# EAGLE board sch (EAGLE 7.4.0)

Size 164.77 x 114.29 mm. Coordinates in mm from the lower left corner, seen from the top.
Outline: 0,0 164.77,0 164.77,114.29 0,114.29 0,0
Copper layers (1*16): Top 0.035mm / dielectric 1.5mm / Bottom 0.035mm
Design rules "default": minimum track width 10mil, minimum drill 24mil, track to track 8mil, track to pad 8mil, pad to pad 8mil, via to via 8mil, smd to smd 8mil, copper to edge 40mil, drill to drill 8mil, minimum pad ring 10mil, minimum via ring 8mil, stop-mask expansion 4mil, vias tented up to drill 0mil, thermal gap 10mil

## Footprints (pad centres in the part's own frame; a part is rotated, then mirrored left to right if it is on the bottom)
MA06-1 = drill 1.016 long: 1 -6.35,0; 2 -3.81,0; 3 -1.27,0; 4 1.27,0; 5 3.81,0; 6 6.35,0
MA08-1 = drill 1.016 long: 1 -8.89,0; 2 -6.35,0; 3 -3.81,0; 4 -1.27,0; 5 1.27,0; 6 3.81,0; 7 6.35,0; 8 8.89,0
255SB = drill 1.118 long: 1 -3.81,0; 2 0,0; 3 3.81,0
C025-025X050 = drill 0.813 octagon: 1 -1.27,0; 2 1.27,0
MA04-1 = drill 1.016 long: 1 -3.81,0; 2 -1.27,0; 3 1.27,0; 4 3.81,0
MA03-1 = drill 1.016 long: 1 -2.54,0; 2 0,0; 3 2.54,0
DIL28-3 = drill 0.813 long: 1 -16.51,-3.81; 2 -13.97,-3.81; 3 -11.43,-3.81; 4 -8.89,-3.81; 5 -6.35,-3.81; 6 -3.81,-3.81; 7 -1.27,-3.81; 8 1.27,-3.81; 9 3.81,-3.81; 10 6.35,-3.81; 11 8.89,-3.81; 12 11.43,-3.81; 13 13.97,-3.81; 14 16.51,-3.81; 15 16.51,3.81; 16 13.97,3.81; 17 11.43,3.81; 18 8.89,3.81; 19 6.35,3.81; 20 3.81,3.81; 21 1.27,3.81; 22 -1.27,3.81; 23 -3.81,3.81; 24 -6.35,3.81; 25 -8.89,3.81; 26 -11.43,3.81; 27 -13.97,3.81; 28 -16.51,3.81
DIL16 = drill 0.813 long: 1 -8.89,-3.81; 2 -6.35,-3.81; 3 -3.81,-3.81; 4 -1.27,-3.81; 5 1.27,-3.81; 6 3.81,-3.81; 7 6.35,-3.81; 8 8.89,-3.81; 9 8.89,3.81; 10 6.35,3.81; 11 3.81,3.81; 12 1.27,3.81; 13 -1.27,3.81; 14 -3.81,3.81; 15 -6.35,3.81; 16 -8.89,3.81
AVR_ICSP = drill 1.016 pad 1.88 octagon: 1 -1.27,5.08; 2 1.27,5.08; 3 -1.27,2.54; 4 1.27,2.54; 5 -1.27,0; 6 1.27,0; 7 -1.27,-2.54; 8 1.27,-2.54; 9 -1.27,-5.08; 10 1.27,-5.08
LED3MM = drill 0.813 octagon: A -1.27,0; K 1.27,0
HC49/S = drill 0.813: 1 -2.413,0; 2 2.413,0
0204/5 = drill 0.813 octagon: 1 -2.54,0; 2 2.54,0
RN-9 = drill 0.813 long: 1 -10.16,0; 2 -7.62,0; 3 -5.08,0; 4 -2.54,0; 5 0,0; 6 2.54,0; 7 5.08,0; 8 7.62,0; 9 10.16,0
MA20-2 = drill 1.016 octagon: 1 -24.13,-1.27; 2 -24.13,1.27; 3 -21.59,-1.27; 4 -21.59,1.27; 5 -19.05,-1.27; 6 -19.05,1.27; 7 -16.51,-1.27; 8 -16.51,1.27; 9 -13.97,-1.27; 10 -13.97,1.27; 11 -11.43,-1.27; 12 -11.43,1.27; 13 -8.89,-1.27; 14 -8.89,1.27; 15 -6.35,-1.27; 16 -6.35,1.27; 17 -3.81,-1.27; 18 -3.81,1.27; 19 -1.27,-1.27; 20 -1.27,1.27; 21 1.27,-1.27; 22 1.27,1.27; 23 3.81,-1.27; 24 3.81,1.27; 25 6.35,-1.27; 26 6.35,1.27; 27 8.89,-1.27; 28 8.89,1.27; 29 11.43,-1.27; 30 11.43,1.27; 31 13.97,-1.27; 32 13.97,1.27; 33 16.51,-1.27; 34 16.51,1.27; 35 19.05,-1.27; 36 19.05,1.27; 37 21.59,-1.27; 38 21.59,1.27; 39 24.13,-1.27; 40 24.13,1.27
SMS-008 = smd 1.092 x 2.007: 1 -8.89,-4.496; 2 -6.35,-4.496; 3 -3.81,-4.496; 4 -1.27,-4.496; 5 1.27,-4.496; 6 3.81,-4.496; 7 6.35,-4.496; 8 8.89,-4.496; 9 8.89,4.496; 10 6.35,4.496; 11 3.81,4.496; 12 1.27,4.496; 13 -1.27,4.496; 14 -3.81,4.496; 15 -6.35,4.496; 16 -8.89,4.496
B3F-10XX = drill 1.016 long: 1 -3.251,2.261; 2 3.251,2.261; 3 -3.251,-2.261; 4 3.251,-2.261
DIP254P762X457-28 = drill 1.118 square: 1 -7.62,33.02 | drill 1.118: 2 -7.62,30.48; 3 -7.62,27.94; 4 -7.62,25.4; 5 -7.62,22.86; 6 -7.62,20.32; 7 -7.62,17.78; 8 -7.62,15.24; 9 -7.62,12.7; 10 -7.62,10.16; 11 -7.62,7.62; 12 -7.62,5.08; 13 -7.62,2.54; 14 -7.62,0; 15 0,0; 16 0,2.54; 17 0,5.08; 18 0,7.62; 19 0,10.16; 20 0,12.7; 21 0,15.24; 22 0,17.78; 23 0,20.32; 24 0,22.86; 25 0,25.4; 26 0,27.94; 27 0,30.48; 28 0,33.02
DIP254P762X432-16 = drill 0.991 square: 1 -7.62,17.78 | drill 0.991: 2 -7.62,15.24; 3 -7.62,12.7; 4 -7.62,10.16; 5 -7.62,7.62; 6 -7.62,5.08; 7 -7.62,2.54; 8 -7.62,0; 9 0,0; 10 0,2.54; 11 0,5.08; 12 0,7.62; 13 0,10.16; 14 0,12.7; 15 0,15.24; 16 0,17.78
LOGIC_LEVEL_CONVERTER = drill 0.8: P$1 1.27,13.97; P$2 1.27,11.43; P$3 1.27,8.89; P$4 1.27,6.35; P$5 1.27,3.81; P$6 1.27,1.27; P$7 11.43,1.27; P$8 11.43,3.81; P$9 11.43,6.35; P$10 11.43,8.89; P$11 11.43,11.43; P$12 11.43,13.97

## Placement (x,y rotation side)
3V3_BUS  [MA06-1]  106.68,88.9 0 top
5V_BUS  [MA06-1]  106.68,95.25 0 top
ANALOG_BANK0  [MA08-1]  22.86,46.99 0 top
ANALOG_BANK1  [MA08-1]  22.86,52.07 0 top
ANALOG_BANK2  [MA08-1]  22.86,57.15 0 top
ANALOG_BANK3  [MA08-1]  22.86,62.23 0 top
AUTO_SW  [255SB]  121.92,5.08 0 top
C1  [C025-025X050]  58.42,95.25 0 top
C2  [C025-025X050]  64.77,95.25 0 top
CAN_BUS  [MA04-1]  90.17,95.25 0 top
EXT_I2C0  [MA03-1]  86.36,101.6 0 top
EXT_I2C1  [MA03-1]  96.52,101.6 0 top
EXT_I2C2  [MA03-1]  106.68,101.6 0 top
EXT_I2C3  [MA03-1]  116.84,101.6 0 top
EXT_I2C4  [MA03-1]  127,101.6 0 top
EXT_I2C5  [MA03-1]  5.08,54.61 0 top
EXT_SPI0  [MA04-1]  146.05,100.33 0 top
EXT_SPI1  [MA04-1]  146.05,95.25 0 top
EXT_SPI2  [MA04-1]  147.32,90.17 0 top
EXT_SPI3  [MA04-1]  147.32,83.82 0 top
EXT_SPI4  [MA04-1]  147.32,77.47 0 top
EXT_SPI5  [MA04-1]  5.08,40.64 90 top
GND_BUS  [MA06-1]  45.72,83.82 0 top
GPIO_BANK0  [MA08-1]  152.4,50.8 0 top
GPIO_BANK1  [MA08-1]  152.4,55.88 0 top
GPIO_BANK2  [MA08-1]  152.4,60.96 0 top
GPIO_BANK3  [MA08-1]  152.4,66.04 0 top
IC1  MCP23S17SP  [DIL28-3]  140.97,29.21 0 top
IC2  MCP23S17SP  [DIL28-3]  140.97,41.91 180 top
IC3  MCP23S17SP  [DIL28-3]  24.13,95.25 0 top
IC4  74LS165N  [DIL16]  22.86,72.39 0 top
J1  AVR_SPI_PROG2PTH  [AVR_ICSP]  5.08,17.78 0 top
LED1  [LED3MM]  118.11,110.49 0 top
LED2  [LED3MM]  127,110.49 0 top
LED3  [LED3MM]  138.43,110.49 0 top
POWER_IN  [MA03-1]  3.81,5.08 90 top
PR_SW  [255SB]  106.68,5.08 0 top
Q1  [HC49/S]  60.96,102.87 0 top
R1  [0204/5]  100.33,106.68 0 top
R2  [0204/5]  92.71,106.68 0 top
R3  [0204/5]  85.09,106.68 0 top
R4  [0204/5]  77.47,106.68 0 top
RN1  [RN-9]  113.03,68.58 0 top
RPI_HEADER  [MA20-2]  29.21,105.41 0 top
RTC_CON  [MA03-1]  88.9,5.08 0 top
S1  SWS008  [SMS-008]  113.03,59.69 0 top
S2  [B3F-10XX]  129.54,92.71 0 top
SHIFT_CON  [MA03-1]  74.93,100.33 0 top
SHIFT_CONT_SW  [B3F-10XX]  129.54,82.55 0 top
SHIFT_OUT  [MA03-1]  74.93,93.98 0 top
U1  ATMEGA328P-PU  [DIP254P762X457-28]  110.49,13.97 0 top
U$1  MCP3208-CI/P  [DIP254P762X432-16]  26.67,5.08 0 top
U$2  MCP3208-CI/P  [DIP254P762X432-16]  41.91,5.08 0 top
U$3  MCP3208-CI/P  [DIP254P762X432-16]  54.61,5.08 0 top
U$4  LOGIC_LEVEL_CONVERTER  [LOGIC_LEVEL_CONVERTER]  146.05,6.35 0 top
U$5  MCP3208-CI/P  [DIP254P762X432-16]  67.31,5.08 0 top

## Library data of the parts
3V3_BUS 5V_BUS ANALOG_BANK0 ANALOG_BANK1-ANALOG_BANK3 CAN_BUS EXT_I2C0 EXT_I2C1-EXT_I2C5 EXT_SPI0 EXT_SPI1-EXT_SPI5 GND_BUS GPIO_BANK0 GPIO_BANK1-GPIO_BANK3 POWER_IN RPI_HEADER RTC_CON SHIFT_CON SHIFT_OUT = con-lstb; OC_FARNELL: unknown; OC_NEWARK: unknown
AUTO_SW PR_SW = switch
C1 C2 R1-R4 = rcl
IC1-IC3 = microchip; MF: MICROCHIP; MPN: MCP23S17-E/SP; OC_FARNELL: 1292238; OC_NEWARK: 31K2951
IC4 = 74xx-us
J1 = SparkFun-Connectors
LED1-LED3 = led
Q1 = crystal; OC_FARNELL: 1667008; OC_NEWARK: unknown
RN1 = resistor-net; OC_FARNELL: unknown; OC_NEWARK: unknown
S1 = smd-special
S2 SHIFT_CONT_SW = switch-omron; MPN: B3F-1000; OC_FARNELL: 176432; OC_NEWARK: 36M3542
U1 = Atmel_By_element14_Batch_1-00; MPN: ATMEGA328P-PU; OC_FARNELL: 1715487; OC_NEWARK: 15R0268; PACKAGE: PDIP-28; SUPPLIER: Atmel
U$1-U$3 U$5 = Microchip_By_element14_Batch_1; MPN: MCP3208-CI/P; OC_FARNELL: 1084269; OC_NEWARK: 58K1815; PACKAGE: DIP-16; SUPPLIER: Microchip
U$4 = SparkFun-Boards

## Nets
3V3: 3V3_BUS.1 3V3_BUS.2 3V3_BUS.3 3V3_BUS.4 3V3_BUS.5 3V3_BUS.6 IC1.9 IC1.18 IC2.9 IC2.18 IC3.9 IC3.18 IC4.16 PR_SW.1 RPI_HEADER.1 RPI_HEADER.17 S1.1 S1.2 S1.3 S1.4 S1.5 S1.6 S1.7 S1.8 U$4.P$3
5V: 5V_BUS.1 5V_BUS.2 5V_BUS.3 5V_BUS.4 5V_BUS.5 5V_BUS.6 POWER_IN.1 POWER_IN.2 RPI_HEADER.2 RPI_HEADER.4 U$1.15 U$1.16 U$3.15 U$3.16 U$4.P$10 U$5.15 U$5.16
AVCC: U1.20
CAN_CS: CAN_BUS.1 IC1.21
DAQ_CS0: IC1.11 RPI_HEADER.24
DAQ_CS1: RPI_HEADER.26
DAQ_EEC: RPI_HEADER.28
DAQ_EED: RPI_HEADER.27
DAQ_MISO: CAN_BUS.4 EXT_SPI0.4 EXT_SPI1.4 EXT_SPI2.4 EXT_SPI3.4 EXT_SPI4.4 EXT_SPI5.4 IC1.14 IC2.14 IC3.14 RPI_HEADER.21 U$4.P$5
DAQ_MOSI: CAN_BUS.3 EXT_SPI0.3 EXT_SPI1.3 EXT_SPI2.3 EXT_SPI3.3 EXT_SPI4.3 EXT_SPI5.3 IC1.13 IC2.13 IC3.13 RPI_HEADER.19 U$4.P$6
DAQ_RX: RPI_HEADER.10 U1.3
DAQ_SCK: CAN_BUS.2 EXT_SPI0.2 EXT_SPI1.2 EXT_SPI2.2 EXT_SPI3.2 EXT_SPI4.2 EXT_SPI5.2 IC1.12 IC2.12 IC3.12 RPI_HEADER.23 U$4.P$1
DAQ_SCL: EXT_I2C0.3 EXT_I2C1.3 EXT_I2C2.3 EXT_I2C3.3 EXT_I2C4.3 EXT_I2C5.3 RPI_HEADER.5 RTC_CON.3
DAQ_SDA: EXT_I2C0.2 EXT_I2C1.2 EXT_I2C2.2 EXT_I2C3.2 EXT_I2C4.2 EXT_I2C5.2 RPI_HEADER.3 RTC_CON.2
DAQ_SYNC: RPI_HEADER.12 U1.6
DAQ_TX: RPI_HEADER.8 U1.2
EXT_CS0: EXT_SPI0.1 IC1.28
EXT_CS1: EXT_SPI1.1 IC1.1
EXT_CS2: EXT_SPI2.1 IC1.2
EXT_CS3: EXT_SPI3.1 IC1.3
EXT_CS4: EXT_SPI4.1 IC1.4
EXT_CS5: EXT_SPI5.1 IC1.5
GND: AUTO_SW.3 C1.2 C2.2 EXT_I2C0.1 EXT_I2C1.1 EXT_I2C2.1 EXT_I2C3.1 EXT_I2C4.1 EXT_I2C5.1 GND_BUS.1 GND_BUS.2 GND_BUS.3 GND_BUS.4 GND_BUS.5 GND_BUS.6 IC1.10 IC1.15 IC1.16 IC1.17 IC4.8 IC4.10 J1.4 J1.6 J1.8 J1.10 LED1.K LED2.K LED3.K POWER_IN.3 RN1.1 RPI_HEADER.6 RPI_HEADER.9 RPI_HEADER.14 RPI_HEADER.20 RPI_HEADER.25 RPI_HEADER.30 RPI_HEADER.34 RPI_HEADER.39 RTC_CON.1 S2.1 S2.2 SHIFT_CONT_SW.1 SHIFT_CONT_SW.2 U1.8 U1.22 U$1.9 U$1.14 U$2.9 U$2.14 U$3.9 U$3.14 U$4.P$4 U$4.P$9 U$5.9 U$5.14
GPIO_4: RPI_HEADER.7
GPIO_5: RPI_HEADER.29
GPIO_6: RPI_HEADER.31
GPIO_12: RPI_HEADER.32
GPIO_13: RPI_HEADER.33
GPIO_16: RPI_HEADER.36
GPIO_17: RPI_HEADER.11
GPIO_19: RPI_HEADER.35
GPIO_20: RPI_HEADER.38
GPIO_21: RPI_HEADER.40
GPIO_22: RPI_HEADER.15
GPIO_23: RPI_HEADER.16
GPIO_24: RPI_HEADER.18
GPIO_25: RPI_HEADER.22
GPIO_26: RPI_HEADER.37
GPIO_27: RPI_HEADER.13
GPIO_CS0: IC1.26 IC2.11
GPIO_CS1: IC1.27 IC3.11
N$1: GPIO_BANK2.1 IC3.21
N$2: GPIO_BANK2.2 IC3.22
N$3: GPIO_BANK2.3 IC3.23
N$4: IC2.10 IC3.10
N$5: U$2.15 U$2.16
N$6: IC2.15 IC2.16 IC2.17 IC3.15 IC3.16 IC3.17
N$7: IC1.22 U$1.10
N$8: IC1.23 U$2.10
N$9: IC1.24 U$3.10
N$10: IC4.11 RN1.9 S1.16
N$11: IC4.12 RN1.8 S1.15
N$12: IC4.13 RN1.7 S1.14
N$13: IC4.14 RN1.6 S1.13
N$14: IC4.3 RN1.5 S1.12
N$15: IC4.4 RN1.4 S1.11
N$16: IC4.5 RN1.3 S1.10
N$17: IC4.6 RN1.2 S1.9
N$18: ANALOG_BANK3.8 U$5.1
N$19: ANALOG_BANK0.6 U$1.3
N$20: GPIO_BANK2.4 IC3.24
N$21: GPIO_BANK2.5 IC3.25
N$22: GPIO_BANK2.6 IC3.26
N$23: LED3.A R3.1
N$24: LED2.A R2.1
N$25: LED1.A R1.1
N$26: R1.2 U1.14
N$27: R2.2 U1.15
N$28: R3.2 U1.16
N$29: GPIO_BANK2.7 IC3.27
N$30: U$1.12 U$2.12 U$3.12 U$4.P$7 U$5.12
N$31: U$1.11 U$2.11 U$3.11 U$4.P$8 U$5.11
N$32: U$1.13 U$2.13 U$3.13 U$4.P$11 U$5.13
N$33: GPIO_BANK2.8 IC3.28
N$34: GPIO_BANK3.1 IC3.1
N$35: GPIO_BANK3.2 IC3.2
N$36: IC1.25 U$5.10
N$37: GPIO_BANK3.3 IC3.3
N$38: GPIO_BANK3.4 IC3.4
N$39: GPIO_BANK3.5 IC3.5
N$40: GPIO_BANK3.6 IC3.6
N$41: GPIO_BANK3.7 IC3.7
N$42: GPIO_BANK3.8 IC3.8
N$43: GPIO_BANK1.8 IC2.8
N$44: GPIO_BANK1.7 IC2.7
N$45: GPIO_BANK1.6 IC2.6
N$46: GPIO_BANK1.5 IC2.5
N$47: GPIO_BANK1.4 IC2.4
N$48: GPIO_BANK1.3 IC2.3
N$49: GPIO_BANK1.2 IC2.2
N$50: GPIO_BANK1.1 IC2.1
N$51: GPIO_BANK0.8 IC2.28
N$52: GPIO_BANK0.7 IC2.27
N$53: GPIO_BANK0.6 IC2.26
N$54: GPIO_BANK0.5 IC2.25
N$55: GPIO_BANK0.4 IC2.24
N$56: GPIO_BANK0.3 IC2.23
N$57: GPIO_BANK0.2 IC2.22
N$58: GPIO_BANK0.1 IC2.21
N$60: ANALOG_BANK3.7 U$5.2
N$61: ANALOG_BANK3.6 U$5.3
N$62: ANALOG_BANK3.5 U$5.4
N$63: ANALOG_BANK3.4 U$5.5
N$64: ANALOG_BANK3.3 U$5.6
N$65: ANALOG_BANK3.2 U$5.7
N$66: ANALOG_BANK3.1 U$5.8
N$67: ANALOG_BANK2.1 U$3.8
N$68: ANALOG_BANK2.2 U$3.7
N$69: ANALOG_BANK2.3 U$3.6
N$70: ANALOG_BANK2.4 U$3.5
N$71: ANALOG_BANK2.5 U$3.4
N$72: ANALOG_BANK2.6 U$3.3
N$73: ANALOG_BANK2.7 U$3.2
N$74: ANALOG_BANK2.8 U$3.1
N$75: ANALOG_BANK1.1 U$2.8
N$76: ANALOG_BANK1.2 U$2.7
N$77: ANALOG_BANK1.3 U$2.6
N$78: ANALOG_BANK1.4 U$2.5
N$79: ANALOG_BANK1.5 U$2.4
N$80: ANALOG_BANK1.6 U$2.3
N$81: ANALOG_BANK1.7 U$2.2
N$82: ANALOG_BANK1.8 U$2.1
N$83: ANALOG_BANK0.1 U$1.8
N$84: ANALOG_BANK0.2 U$1.7
N$85: ANALOG_BANK0.3 U$1.6
N$86: ANALOG_BANK0.4 U$1.5
N$87: ANALOG_BANK0.5 U$1.4
N$89: ANALOG_BANK0.7 U$1.2
N$90: ANALOG_BANK0.8 U$1.1
PR_MISO: J1.9 U1.18
PR_MOSI: J1.1 U1.17
PR_RST: J1.5 R4.2 S2.3 S2.4 U1.1
PR_SCK: J1.7 U1.19
PR_VCC: J1.2 PR_SW.3
SDN_OUT: SHIFT_OUT.3 U1.28
SH_EN: AUTO_SW.2 U1.11
SH_HLD: IC4.1 U1.25
SH_INH: IC4.15 U1.24
SH_OUT: IC4.9 U1.26
SH_SER: IC4.2 U1.23
SH_SHDN: SHIFT_CON.3 U1.5
SH_SHUP: SHIFT_CON.1 U1.4
SH_SW: SHIFT_CONT_SW.3 SHIFT_CONT_SW.4 U1.12
SH_VCC: AUTO_SW.1 PR_SW.2 R4.1 U1.7
SU_OUT: SHIFT_OUT.1 U1.27
XTAL1: C1.1 Q1.2 U1.9
XTAL2: C2.1 Q1.1 U1.10

## Tracks (layer width: path | path; a pad name or v marks a point on that pad's centre or on a via)
3V3  (24 unrouted)
5V  (16 unrouted)
CAN_CS  (1 unrouted)
DAQ_CS0  (1 unrouted)
DAQ_MISO  (11 unrouted)
DAQ_MOSI  (11 unrouted)
DAQ_RX  (1 unrouted)
DAQ_SCK  (11 unrouted)
DAQ_SCL  (7 unrouted)
DAQ_SDA  (7 unrouted)
DAQ_SYNC  (1 unrouted)
DAQ_TX  (1 unrouted)
EXT_CS0  (1 unrouted)
EXT_CS1  (1 unrouted)
EXT_CS2  (1 unrouted)
EXT_CS3  (1 unrouted)
EXT_CS4  (1 unrouted)
EXT_CS5  (1 unrouted)
GND  (54 unrouted)
GPIO_CS0  (1 unrouted)
GPIO_CS1  (1 unrouted)
N$1  (1 unrouted)
N$2  (1 unrouted)
N$3  (1 unrouted)
N$4  (1 unrouted)
N$5  (1 unrouted)
N$6  (5 unrouted)
N$7  (1 unrouted)
N$8  (1 unrouted)
N$9  (1 unrouted)
N$10  (2 unrouted)
N$11  (2 unrouted)
N$12  (2 unrouted)
N$13  (2 unrouted)
N$14  (2 unrouted)
N$15  (2 unrouted)
N$16  (2 unrouted)
N$17  (2 unrouted)
N$18  (1 unrouted)
N$19  (1 unrouted)
N$20  (1 unrouted)
N$21  (1 unrouted)
N$22  (1 unrouted)
N$23  (1 unrouted)
N$24  (1 unrouted)
N$25  (1 unrouted)
N$26  (1 unrouted)
N$27  (1 unrouted)
N$28  (1 unrouted)
N$29  (1 unrouted)
N$30  (4 unrouted)
N$31  (4 unrouted)
N$32  (4 unrouted)
N$33  (1 unrouted)
N$34  (1 unrouted)
N$35  (1 unrouted)
N$36  (1 unrouted)
N$37  (1 unrouted)
N$38  (1 unrouted)
N$39  (1 unrouted)
N$40  (1 unrouted)
N$41  (1 unrouted)
N$42  (1 unrouted)
N$43  (1 unrouted)
N$44  (1 unrouted)
N$45  (1 unrouted)
N$46  (1 unrouted)
N$47  (1 unrouted)
N$48  (1 unrouted)
N$49  (1 unrouted)
N$50  (1 unrouted)
N$51  (1 unrouted)
N$52  (1 unrouted)
N$53  (1 unrouted)
N$54  (1 unrouted)
N$55  (1 unrouted)
N$56  (1 unrouted)
N$57  (1 unrouted)
N$58  (1 unrouted)
N$60  (1 unrouted)
N$61  (1 unrouted)
N$62  (1 unrouted)
N$63  (1 unrouted)
N$64  (1 unrouted)
N$65  (1 unrouted)
N$66  (1 unrouted)
N$67  (1 unrouted)
N$68  (1 unrouted)
N$69  (1 unrouted)
N$70  (1 unrouted)
N$71  (1 unrouted)
N$72  (1 unrouted)
N$73  (1 unrouted)
N$74  (1 unrouted)
N$75  (1 unrouted)
N$76  (1 unrouted)
N$77  (1 unrouted)
N$78  (1 unrouted)
N$79  (1 unrouted)
N$80  (1 unrouted)
N$81  (1 unrouted)
N$82  (1 unrouted)
N$83  (1 unrouted)
N$84  (1 unrouted)
N$85  (1 unrouted)
N$86  (1 unrouted)
N$87  (1 unrouted)
N$89  (1 unrouted)
N$90  (1 unrouted)
PR_MISO  (1 unrouted)
PR_MOSI  (1 unrouted)
PR_RST  (4 unrouted)
PR_SCK  (1 unrouted)
PR_VCC  (1 unrouted)
SDN_OUT  (1 unrouted)
SH_EN  (1 unrouted)
SH_HLD  (1 unrouted)
SH_INH  (1 unrouted)
SH_OUT  (1 unrouted)
SH_SER  (1 unrouted)
SH_SHDN  (1 unrouted)
SH_SHUP  (1 unrouted)
SH_SW  (2 unrouted)
SH_VCC  (3 unrouted)
SU_OUT  (1 unrouted)
XTAL1  (2 unrouted)
XTAL2  (2 unrouted)